# Altium PCB Gastroscopy-Tool-Interface.PcbDoc
Units mm, origin at the board's own origin, x right, y up, seen from the top; angles counter-clockwise.
Board outline 14.8 x 37 mm, 4 copper layers (Top Layer, Layer 4 (GND), Layer 5 (PWR), Bottom Layer), stack 1.49 mm thick; 29 components, 21 nets, 110 pads, 0 vias.
Unrouted connection lines stored in the file: 58.
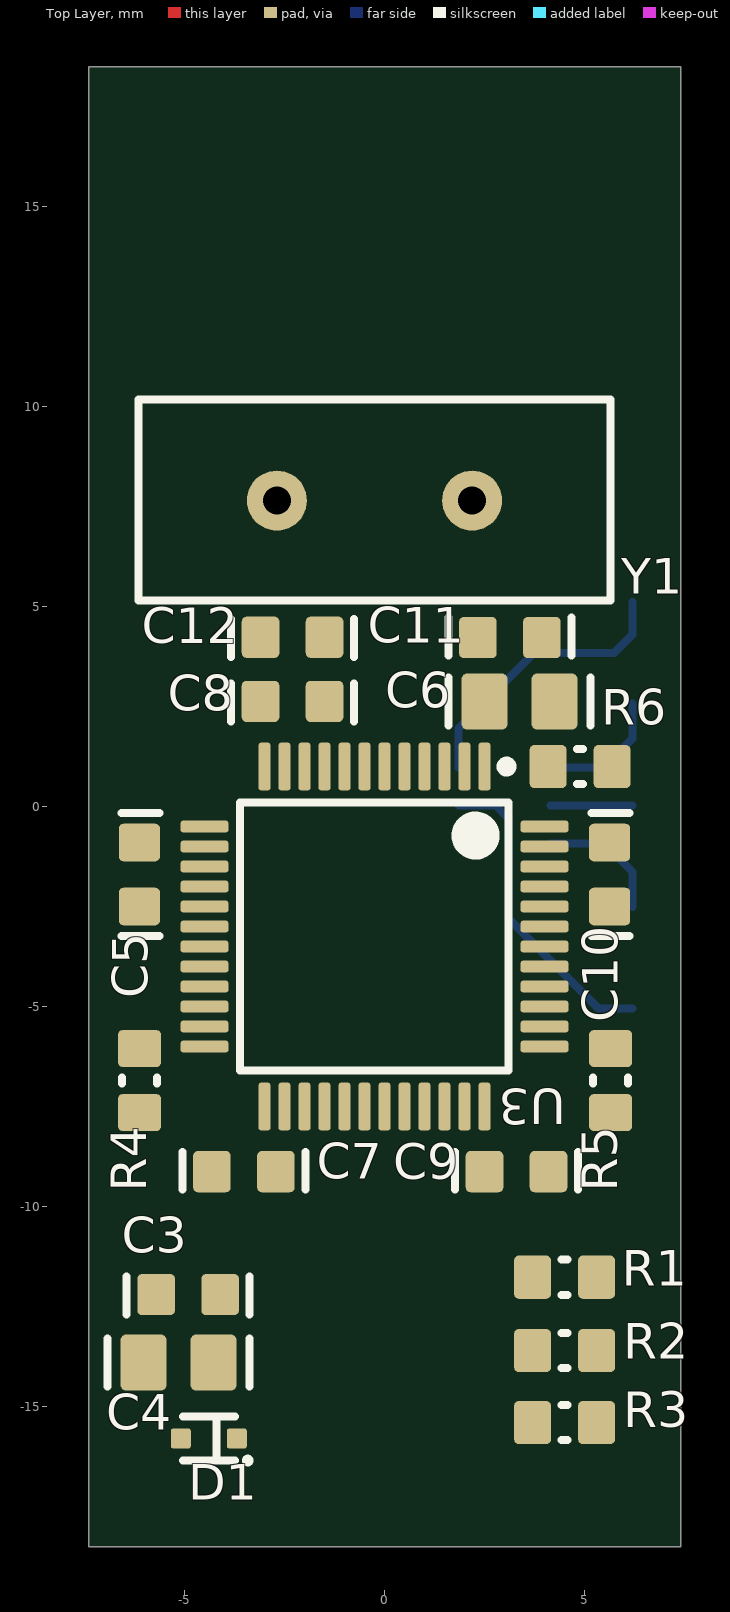
[diagram p0: Top Layer view]
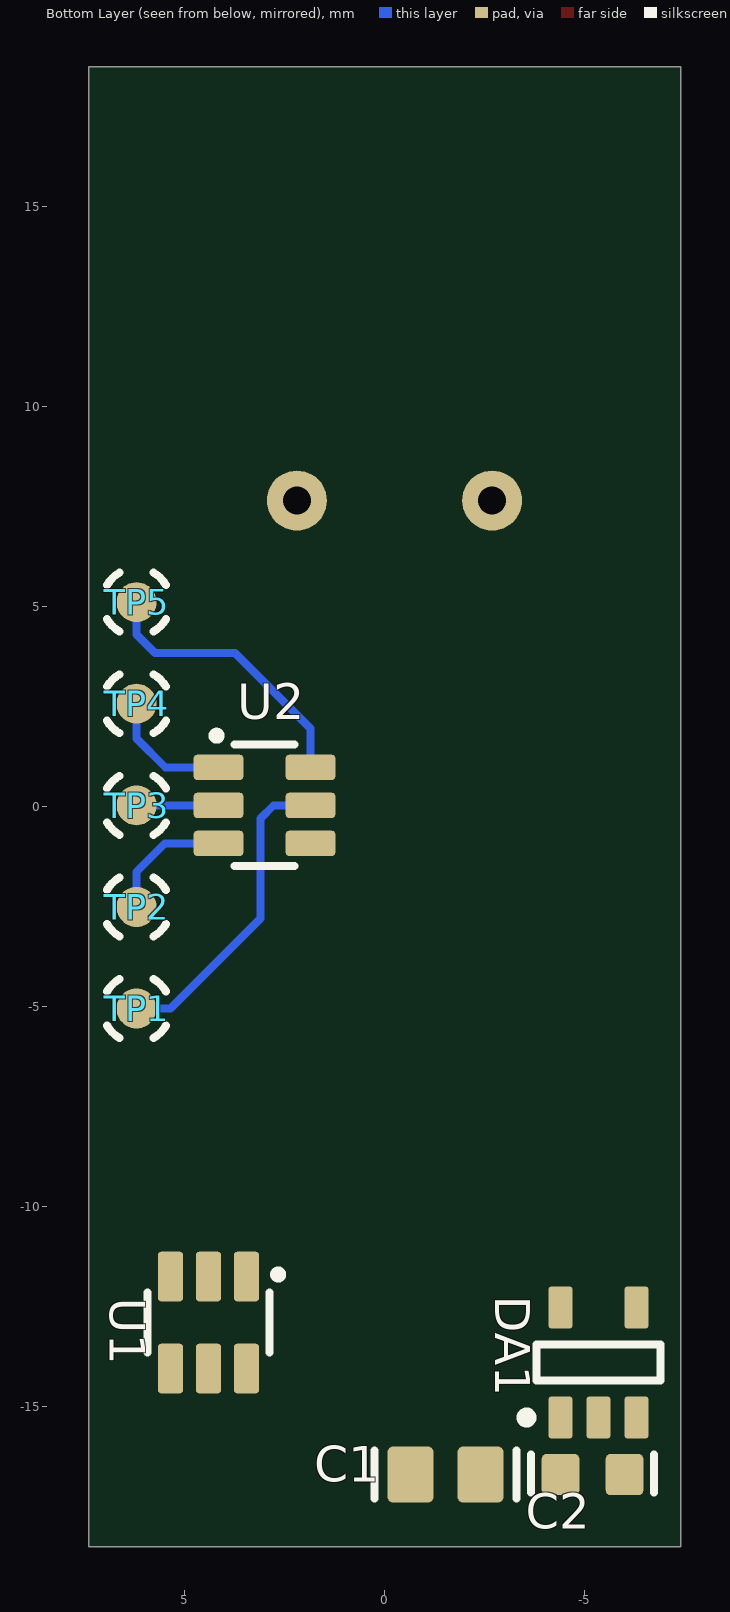
[diagram p1: Bottom Layer view, seen from below]

## Layer stack, top to bottom
Top Solder: solder mask 0.0127, Dk 4
Top Layer: signal copper 0.018
Prepreg 1: prepreg 0.127, Dk 4.2
Layer 4 (GND): signal copper 0.018
Core 2: core 1.164, Dk 4.2
Layer 5 (PWR): signal copper 0.018
Prepreg 4: prepreg 0.127, Dk 4.2
Bottom Layer: signal copper 0.018
Bottom Solder: solder mask 0.0127, Dk 4

## Board outline
-7.4,-18.5 7.4,-18.5 7.4,18.5 -7.4,18.5

## Design rules (kind name [scope] priority, off if disabled: settings)
BoardOutlineClearance [All] p1: gap=0.508 ignorepadtopadclearanceinfootprint=FALSE
Clearance Clearance_CHASSIS [InNet('CHASSIS')] p1: gap=0.508 ignorepadtopadclearanceinfootprint=FALSE // ETH chassis to other
Clearance Clearance_TP [HasFootprint('TEST_POINT_TH')] p2: gap=0.508 ignorepadtopadclearanceinfootprint=FALSE // Test point for programming
Clearance Clearance_ETH_VDDA [InNamedPolygon('ETH_VDDA') vs InNamedPolygon('SOLID_3V3_LAYER5')] p3: gap=0.127 ignorepadtopadclearanceinfootprint=FALSE except(0.508: Fill-Fill Fill-Poly Fill-Region Poly-Poly Poly-Region Region-Region) // ETH_VDDA clearance to 3V3 polygon
Clearance Clearance_VCC_PLANE [InNamedPolygon('SOLID_3V3_LAYER5')] p4: gap=0.178 ignorepadtopadclearanceinfootprint=FALSE // Clearance between 3V3 VCC plane and vias
Clearance Clearance_Signal_Via [IsLinkedToPadViaTemplate('signal_via')] p5: gap=0.127 ignorepadtopadclearanceinfootprint=FALSE except(0.178: Via-Fill Via-Poly Via-Region) // 50 Ohm via, clearance to GND plane and to other polygons
Clearance Clearance_3W [OnLayer('Layer 3 (SIG)')] p6: gap=0.127 ignorepadtopadclearanceinfootprint=FALSE except(0.254: Arc-Arc Arc-Track Arc-SMDPad Arc-THPad Arc-Via Arc-Fill Arc-Poly Arc-Region Arc-Text Arc-Hole Track-Track Track-SMDPad Track-THPad Track-Via Track-Fill Track-Poly Track-Region Track-Text Track-Hole) // 3W rule for high-speed nets; applicable for 5mil tracks
Clearance [All] p7: gap=0.127 ignorepadtopadclearanceinfootprint=FALSE except(0.26: Arc-Hole Track-Hole SMDPad-Hole THPad-Hole Via-Hole Fill-Hole Poly-Hole Region-Hole Text-Hole) // Track-Track 7 mil for MCU
ComponentClearance ComponentClearance_TERMINALS [HasFootprint('DG128-5.0-03P-14') or HasFootprint('DG128-5.0-02P-14')] p1: gap=0 collisioncheckmode=3 verticalgap=0 showdistances=FALSE
ComponentClearance [All] p2: gap=0.508 collisioncheckmode=3 verticalgap=1.016 showdistances=FALSE donotcheckwithout3dbody=TRUE
DiffPairsRouting DiffPairsRouting_RS485 [InDifferentialPairClass('RS485_DIFFPAIR')] p1: maxlimit=0.305 minlimit=0.305 mostfreqgap=0.305 toplayer_minwidth=0.178 toplayer_maxwidth=0.178 toplayer_prefwidth=0.178 midlayer3_minwidth=0.178 midlayer3_maxwidth=0.178 midlayer3_prefwidth=0.178 midlayer4_minwidth=0.178 midlayer4_maxwidth=0.178 midlayer4_prefwidth=0.178 bottomlayer_minwidth=0.178 bottomlayer_maxwidth=0.178 bottomlayer_prefwidth=0.178 maxuncoupledlength=12.7 // 120 Ohm differential impedance
DiffPairsRouting DiffPairsRouting_USB [InDifferentialPairClass('USB_DIFFPAIR')] p2: maxlimit=0.127 minlimit=0.1 mostfreqgap=0.127 toplayer_mingap=0.127 toplayer_minwidth=0.19 toplayer_maxwidth=0.19 toplayer_prefwidth=0.19 bottomlayer_mingap=0.127 bottomlayer_minwidth=0.19 bottomlayer_maxwidth=0.19 bottomlayer_prefwidth=0.19 impedanceprofiledriven=TRUE impedanceprofileid={13F299FD-EDF9-4D52-ACC5-885CEE12CEAA} impedanceprofilevalue=90.000000 maxuncoupledlength=1.016 // 90 Ohm differential impedance
DiffPairsRouting DiffPairsRouting_MDI [InDifferentialPairClass('MDI_DIFFPAIR')] p3: maxlimit=0.127 minlimit=0.127 mostfreqgap=0.127 toplayer_minwidth=0.203 toplayer_maxwidth=0.203 toplayer_prefwidth=0.203 midlayer3_minwidth=0.203 midlayer3_maxwidth=0.203 midlayer3_prefwidth=0.203 midlayer4_minwidth=0.203 midlayer4_maxwidth=0.203 midlayer4_prefwidth=0.203 bottomlayer_minwidth=0.203 bottomlayer_maxwidth=0.203 bottomlayer_prefwidth=0.203 maxuncoupledlength=1.016 // 100 Ohm differential impedance
HoleSize [All] p1: absolutevalues=TRUE maxlimit=6.35 minlimit=0.254 maxpercent=80.000 minpercent=20.000
HoleToHoleClearance [All] p1: gap=0.381 allowstackedmicrovias=TRUE
MatchedLengths MatchLengths_xSignals_LCD [InxSignalClass('xSignals_LCD')] p1: tolerance=1.016 checknetsindiffpair=FALSE checkdiffpairvsdiffpair=TRUE checkxsignals=TRUE checkothers=TRUE usedelayunits=TRUE delaytolerance=100.000000 targetsourcename=LCD_CLK-LCD_CLK_MCU_PP1
MatchedLengths MatchLengths_xSignals_ETH [InxSignalClass('xSignals_ETH')] p2: tolerance=1.016 checknetsindiffpair=FALSE checkdiffpairvsdiffpair=TRUE checkxsignals=TRUE checkothers=TRUE usedelayunits=TRUE delaytolerance=100.000000 targetsourcename=ETH_CLK-ETH_RMII_CLK_PP1
MatchedLengths MatchLengths_xSignals_FMC [InxSignalClass('xSignals_FMC')] p3: tolerance=1.016 checknetsindiffpair=FALSE checkdiffpairvsdiffpair=TRUE checkxsignals=TRUE checkothers=TRUE usedelayunits=TRUE delaytolerance=100.000000 targetsourcename=FMC_CLK-FMC_CLK_MCU_PP1
MatchedLengths MatchLengths_xSignals_SDC [InxSignalClass('xSignals_SDC')] p4: tolerance=1.016 checknetsindiffpair=FALSE checkdiffpairvsdiffpair=TRUE checkxsignals=TRUE checkothers=TRUE usedelayunits=TRUE delaytolerance=100.000000 targetsourcename=SDMMC1_SDCARD_CK-SDMMC1_SDCARD_CK_MCU_PP1
MatchedLengths MatchedLengths_Diff_Grouped_MDI [InDifferentialPairClass('MDI_DIFFPAIR')] p5: tolerance=1.016 checknetsindiffpair=FALSE checkdiffpairvsdiffpair=TRUE checkxsignals=TRUE checkothers=TRUE
MatchedLengths MatchedLengths_Diff_Within_MDI [InDifferentialPairClass('MDI_DIFFPAIR')] p6: tolerance=1.016 checknetsindiffpair=TRUE checkdiffpairvsdiffpair=FALSE checkxsignals=FALSE checkothers=FALSE
MatchedLengths MatchedLengths_Diff_Within_RS485 [InDifferentialPairClass('RS485_DIFFPAIR')] p7: tolerance=2.54 checknetsindiffpair=TRUE checkdiffpairvsdiffpair=FALSE checkxsignals=FALSE checkothers=FALSE
MatchedLengths MatchedLengths_Diff_Within_USB [InDifferentialPairClass('USB_DIFFPAIR')] p8: tolerance=1.016 checknetsindiffpair=TRUE checkdiffpairvsdiffpair=FALSE checkxsignals=FALSE checkothers=FALSE
MinimumAnnularRing [All] p1: minimumring=0.127
MinimumSolderMaskSliver [All] p1: minsoldermaskwidth=0.05
PlaneConnect [All] p1: planeconnectstyle=Direct reliefexpansion=0.508 reliefentries=4 reliefconductorwidth=0.254 reliefairgap=0.254
PolygonConnect PolygonConnect_POWER_IN_VIN [InNet('VIN+') Or InNet('VIN-') vs HasFootprint('1250360000') Or HasFootprint('1250370000')] p1: connectstyle=Relief reliefconductorwidth=1.27 reliefentries=4 polygonreliefangle="90 Angle" airgapwidth=0.127 // POWER IN terminal blocks to VIN
PolygonConnect PolygonConnect_POWER_TVS_VIN [InNet('VIN+') Or InNet('VIN-') vs HasFootprint('SMA-BIDIR')] p2: connectstyle=Relief reliefconductorwidth=1.27 reliefentries=4 polygonreliefangle="90 Angle" airgapwidth=0.127 // POWER IN TVS diode to VIN
PolygonConnect PolygonConnect_POWER_FUSE [HasFootprint('0ZRS0200FF1E')] p3: connectstyle=Relief reliefconductorwidth=1.27 reliefentries=4 polygonreliefangle="90 Angle" airgapwidth=0.127 // POWER IN fuse
PolygonConnect PolygonConnect_POWER_SWITCH [HasFootprint('48BFSP1M2QT')] p4: connectstyle=Relief reliefconductorwidth=1.016 reliefentries=4 polygonreliefangle="90 Angle" airgapwidth=0.127 // POWER switch
PolygonConnect PolygonConnect_POWER_FILTER [HasFootprint('BNX022-01L')] p5: connectstyle=Relief reliefconductorwidth=2.032 reliefentries=4 polygonreliefangle="90 Angle" airgapwidth=0.127 // POWER filter FL1
PolygonConnect PolygonConnect_POWER_IN_MOSFET [InComponent('Q1')] p6: connectstyle=Relief reliefconductorwidth=0.381 reliefentries=4 polygonreliefangle="90 Angle" airgapwidth=0.127 // Q1 reverse polarity protection MOSFET
PolygonConnect PolygonConnect_MOSFET_ZENER [InComponent('D2')] p7: connectstyle=Relief reliefconductorwidth=0.508 reliefentries=4 polygonreliefangle="90 Angle" airgapwidth=0.127 // Q1 MOSFET gate voltage stabilizer
PolygonConnect PolygonConnect_DCDC_IC [HasFootprint('SOIC-8EP_150MIL') vs InNet('GND')] p8: connectstyle=Relief reliefconductorwidth=2.032 reliefentries=4 polygonreliefangle="90 Angle" airgapwidth=0.127 // DC/DC IC connection
PolygonConnect PolygonConnect_DCDC_CAPS [(WithinRoom('DC/DC Step-Down Converter 12V') Or WithinRoom('DC/DC Step-Down Converter 3.3V')) And HasFootprint('CAP_1210')] p9: connectstyle=Relief reliefconductorwidth=1.27 reliefentries=4 polygonreliefangle="90 Angle" airgapwidth=0.127 // DC/DC input and output capacitors
PolygonConnect PolygonConnect_ETH_BULKCAP [WithinRoom('10/100 Mbps Ethernet PHY') And HasFootprint('CAP_1210')] p10: connectstyle=Relief reliefconductorwidth=1.27 reliefentries=4 polygonreliefangle="90 Angle" airgapwidth=0.127 // 1210 bulck capacitor in ETH power supply
PolygonConnect PolygonConnect_DCDC_IND [(InNet('12V') Or InNet('3V3')) And HasFootprint('SRU1048')] p11: connectstyle=Relief reliefconductorwidth=1.778 reliefentries=4 polygonreliefangle="90 Angle" airgapwidth=0.127 // DC/DC inductors terminal in specific nets
PolygonConnect PolygonConnect_DCDC_5V_IC [HasFootprint('SOT-23-6') vs (InNet('GND') Or InNet('12V')) And WithinRoom('USB 2.0 Full-Speed')] p12: connectstyle=Relief reliefconductorwidth=0.584 reliefentries=4 polygonreliefangle="90 Angle" airgapwidth=0.127 // DC/DC 5V IC connection
PolygonConnect PolygonConnect_DCDC_5V_CAPS [HasFootprint('CAP_1210') vs InNet('5V')] p13: connectstyle=Direct reliefconductorwidth=1.27 reliefentries=4 polygonreliefangle="90 Angle" airgapwidth=0.3 // Caps connection to GND and VCC polygons
PolygonConnect PolygonConnect_DCDC_5V_OUT_CAP [InNet('5V') And HasFootprint('CAP_0603')] p14: connectstyle=Relief reliefconductorwidth=0.813 reliefentries=4 polygonreliefangle="90 Angle" airgapwidth=0.127 // Output cap connection to VCC polygon
PolygonConnect PolygonConnect_DCDC_5V_IND [HasFootprint('SDR1006')] p15: connectstyle=Direct reliefconductorwidth=0.8 reliefentries=4 polygonreliefangle="90 Angle" airgapwidth=0.3 // DC/DC 5V inductor terminal in specific nets
PolygonConnect PolygonConnect_DCDC_HOTSWITCH [InNet('NetC4_2')] p16: connectstyle=Relief reliefconductorwidth=0.8 reliefentries=4 polygonreliefangle="90 Angle" airgapwidth=0.3 // DC/DC 5V inductor terminal in specific nets
PolygonConnect PolygonConnect_DCDC_BL_IC [WithinRoom('LCD & Capacitive Touchscreen Module') And HasFootprint('SOT-23-6')] p17: connectstyle=Relief reliefconductorwidth=0.584 reliefentries=4 polygonreliefangle="90 Angle" airgapwidth=0.127 // DC/DC Backlight IC
PolygonConnect PolygonConnect_DCDC_BL_CAPS [WithinRoom('LCD & Capacitive Touchscreen Module') And HasFootprint('CAP_0805')] p18: connectstyle=Relief reliefconductorwidth=1.016 reliefentries=4 polygonreliefangle="90 Angle" airgapwidth=0.127 // DC/DC Backlight capacitors
PolygonConnect PolygonConnect_DCDC_BL_IND [WithinRoom('LCD & Capacitive Touchscreen Module') And HasFootprint('LQH3NPN470MMEL')] p19: connectstyle=Relief reliefconductorwidth=0.965 reliefentries=4 polygonreliefangle="90 Angle" airgapwidth=0.127 // DC/DC Backlight inductor
PolygonConnect PolygonConnect_WIFI_GND [InNet('GND') And HasFootprint('ATWINC3400-MR210CA142')] p20: connectstyle=Relief reliefconductorwidth=0.762 reliefentries=4 polygonreliefangle="90 Angle" airgapwidth=0.127 // WiFi module to GND poly
PolygonConnect PolygonConnect_USB_CONN_GND [InNet('GND') vs HasFootprint('USB3106-30-0230-A')] p21: connectstyle=Relief reliefconductorwidth=0.508 reliefentries=4 polygonreliefangle="90 Angle" airgapwidth=0.203 // USB connector GND
PolygonConnect PolygonConnect_FB [HasFootprint('FB_1206')] p22: connectstyle=Relief reliefconductorwidth=1.143 reliefentries=4 polygonreliefangle="90 Angle" airgapwidth=0.127 // Ferrite Bead to poly
PolygonConnect PolygonConnect_FUSE [HasFootprint('PTC_1812')] p23: connectstyle=Relief reliefconductorwidth=1.778 reliefentries=4 polygonreliefangle="90 Angle" airgapwidth=0.127 // Fuse to poly
PolygonConnect PolygonConnect_12V_OUT_SMA [(WithinRoom('RS-485 Interface') Or WithinRoom('Wiegand Interface')) And HasFootprint('SMA')] p24: connectstyle=Relief reliefconductorwidth=1.524 reliefentries=4 polygonreliefangle="90 Angle" airgapwidth=0.127 // TVS diodes in SMA package, 12V output polygons
PolygonConnect PolygonConnect_TP_GND [InNet('GND') vs HasFootprint('TEST_POINT_TH') Or HasFootprint('TEST_POINT_SMT')] p25: connectstyle=Relief reliefconductorwidth=0.508 reliefentries=4 polygonreliefangle="90 Angle" airgapwidth=0.508 // Test points to GND
PolygonConnect PolygonConnect_ETH_CHASSIS [InNet('CHASSIS')] p26: connectstyle=Relief reliefconductorwidth=1.016 reliefentries=4 polygonreliefangle="90 Angle" airgapwidth=0.381 // ETH Chassis
PolygonConnect PolygonConnect_VIA [IsVia] p27: connectstyle=Direct reliefconductorwidth=0.8 reliefentries=4 polygonreliefangle="90 Angle" airgapwidth=0.3
PolygonConnect [All] p28: connectstyle=Relief reliefconductorwidth=0.8 reliefentries=4 polygonreliefangle="90 Angle" airgapwidth=0.3
ReturnPath [OnLayer('Layer 3 (SIG)')] p1: _gaplimit=0.127
RoutingVias [All] p1: holewidth=0.254 width=0.66 viastyle="Through Hole" minholewidth=0.254 minwidth=0.66 maxholewidth=1.016 maxwidth=1.422 useviatemplates=TRUE viatemplateguid#1={79E6DCE3-D317-4519-9061-2CDD01818D80} viatemplateguid#2={DB4F5FA1-A2BD-4F5F-94AF-CFE80AD55038} viatemplatename#1=power_via viatemplatename#2=signal_via
SilkToSilkClearance [All] p1: silktosilkclearance=0.051
SilkToSolderMaskClearance [All] p1: minsilkscreentomaskgap=0.051 clearancetoexposedcopper=FALSE
SolderMaskExpansion SolderMaskExpansion_LQFP176 [HasFootprint('LQFP176')] p1: expansion=0.102 istentingtop=FALSE
SolderMaskExpansion SolderMaskExpansion_TSSOP-14 [HasFootprint('TSSOP-14')] p2: expansion=0.102 istentingtop=FALSE
SolderMaskExpansion SolderMaskExpansion_TSOP-54 [HasFootprint('TSOP-54-II')] p3: expansion=0.127 istentingtop=FALSE
SolderMaskExpansion SolderMaskExpansion_SDCard [HasFootprint('475710001')] p4: expansion=0.102 istentingtop=FALSE
SolderMaskExpansion SolderMaskExpansion_LCD_conns [HasFootprint('62684-402100AHLF') Or HasFootprint('0527460671')] p5: expansion=0.102 istentingtop=FALSE
SolderMaskExpansion SolderMaskExpansion_Via [IsVia] p6: expansion=0.152 istentingtop=TRUE
SolderMaskExpansion [All] p7: expansion=0.076 istentingtop=FALSE
UnRoutedNet [All] p1: checkbadconnections=TRUE
Width Width_Signal_Buried [OnLayer('Layer 3 (SIG)') And  Not InNet('5V')] p1: maxlimit=0.127 minlimit=0.127 preferedwidth=0.127 // 50 Ohm track on buried layers
Width [All] p2: maxlimit=2.54 minlimit=0.127 preferedwidth=0.3 // 50 Ohm track on top and bottom layers
21 further rules are at their usual default settings.

## Classes and differential pairs
component class Connectors: R1 R2 R3 U1
component class "3V3 Domain": C1 C2 C3 C4 D1 DA1
differential pair class USB_DIFFPAIR: D MCU_USB_D USB
component class MCU: C5 C6 C7 C8 C9 C10 C11 C12 R4 R5 R6 TP1 TP2 TP3 TP4 TP5 U2 U3 Y1
differential pair USB: +USB_P -USB_N
differential pair MCU_USB_D: +MCU_USB_D_P -MCU_USB_D_N
differential pair D: +D_P -D_N

## Components (designator, comment, footprint, x,y, rotation, side; value= is the part's Value field where it differs from the comment)
C1 "10uF" CAP_0805 -1.525,-16.7 r180 bottom
C2 "100nF" CAP_0603 -5.2,-16.7 r180 bottom
C3 "100nF" CAP_0603 -4.91,-12.2 r180 top
C4 "10uF" CAP_0805 -5.15,-13.9 r0 top
C5 "100nF" CAP_0603 -6.128,-1.7 r270 top
C6 "10uF" CAP_0805 3.375,2.625 r180 top
C7 "100nF" CAP_0603 -3.515,-9.128 r0 top
C8 "100nF" CAP_0603 -2.3,2.628 r180 top
C9 "100nF" CAP_0603 3.3,-9.128 r0 top
C10 "100nF" CAP_0603 5.628,-1.7 r270 top
C11 "18pF" CAP_0603 3.135,4.225 r0 top
C12 "18pF" CAP_0603 -2.3,4.231 r180 top
D1 "BAS516,315" SOD-523 -4.39,-15.8 r180 top
DA1 "TLV75533PDBVR" SOT-23-5 -5.35,-13.9 r90 bottom
R1 "24R" RES_0603 4.5,-11.766 r0 top
R2 "24R" RES_0603 4.5,-13.6 r0 top
R3 "1.5kR" RES_0603 4.5,-15.4 r0 top
R4 "10kR" RES_0603 -6.125,-6.85 r270 top
R5 "10kR" RES_0603 5.653,-6.85 r90 top
R6 "10kR" RES_0603 4.889,1 r180 top
TP1 "TEST_POINT_SMT" TEST_POINT_SMT 6.2,-5.05 r180 bottom
TP2 "TEST_POINT_SMT" TEST_POINT_SMT 6.2,-2.51 r90 bottom
TP3 "TEST_POINT_SMT" TEST_POINT_SMT 6.2,0.03 r90 bottom
TP4 "TEST_POINT_SMT" TEST_POINT_SMT 6.2,2.57 r90 bottom
TP5 "TEST_POINT_SMT" TEST_POINT_SMT 6.2,5.11 r90 bottom
U1 "USBLC6-2SC6" SOT-23-6 4.4,-12.9 r270 bottom
U2 "SRV05-4ATR" SOT-23-6 3,0.03 r180 bottom
U3 "STM32F103C6T6A" LQFP48 -0.25,-3.25 r270 top
Y1 "8MHz" HC-49/US -0.25,7.65 r0 top

## Footprints (in the part's own frame and the unit in brackets; to place one, negate y for a bottom-side part, rotate by r counter-clockwise, add the part's x,y. Pads: shape width x height; smd on the part's side, far side on the other; paste and mask are expansions set on the pad)
CAP_0603 [mm] "Generic 0603 capacitor, IPC"
  rrect25% 0.94x1.03 smd: 1(-0.8,0) 2(0.8,0)
  silkscreen extent -1.53,-0.45 1.53,0.5, body extent -0.8,-0.4 0.8,0.4, height 0.9
CAP_0805 [mm] "Generic 0805 capacitor, IPC"
  rrect25% 1.15x1.4 smd: 1(-0.875,0) 2(0.875,0)
  silkscreen extent -1.77,-0.6 1.77,0.6, body extent -1.1,-0.67 1.1,0.67, height 1.46
HC-49/US [mm]
  round 1.5 hole 0.7: 1(-2.44,0) 2(2.44,0)
  silkscreen extent -5.9,-2.5 5.9,2.52, body extent -5.67,-2.32 5.68,2.33, height 3.6
LQFP48 [mm] "Thin QFP, 48-Leads, Body 7x7mm, Pitch 0.5mm, IPC Medium Density"
  rrect50% 1.2x0.3 smd mask+0.05: 1(-4.25,2.75) 2(-4.25,2.25) 3(-4.25,1.75) 4(-4.25,1.25) 5(-4.25,0.75) 6(-4.25,0.25) 7(-4.25,-0.25) 8(-4.25,-0.75) 9(-4.25,-1.25) 10(-4.25,-1.75) 11(-4.25,-2.25) 12(-4.25,-2.75) 25(4.25,-2.75) 26(4.25,-2.25) 27(4.25,-1.75) 28(4.25,-1.25) 29(4.25,-0.75) 30(4.25,-0.25) 31(4.25,0.25) 32(4.25,0.75) 33(4.25,1.25) 34(4.25,1.75) 35(4.25,2.25) 36(4.25,2.75)
  rrect50% 0.3x1.2 smd mask+0.05: 13(-2.75,-4.25) 14(-2.25,-4.25) 15(-1.75,-4.25) 16(-1.25,-4.25) 17(-0.75,-4.25) 18(-0.25,-4.25) 19(0.25,-4.25) 20(0.75,-4.25) 21(1.25,-4.25) 22(1.75,-4.25) 23(2.25,-4.25) 24(2.75,-4.25) 37(2.75,4.25) 38(2.25,4.25) 39(1.75,4.25) 40(1.25,4.25) 41(0.75,4.25) 42(0.25,4.25) 43(-0.25,4.25) 44(-0.75,4.25) 45(-1.25,4.25) 46(-1.75,4.25) 47(-2.25,4.25) 48(-2.75,4.25)
  silkscreen extent -4.37,-3.36 3.35,3.43, body extent -4.51,-4.51 4.51,4.51, height 1.46
RES_0603 [mm] "Generic 0603 resistor, IPC"
  rrect25% 0.92x1.08 smd: 1(-0.8,0) 2(0.8,0)
  silkscreen extent -0.08,-0.44 0.08,0.44, body extent -0.8,-0.4 0.8,0.4, height 0.5
SOD-523 [mm]
  rrect25% 0.5x0.5 smd: 1(-0.7,0) 2(0.7,0)
  silkscreen extent -1.04,-0.55 0.65,0.62, body extent -0.8,-0.4 0.8,0.4, height 0.7
SOT-23-5 [mm] "SOT23, 5-Leads, IPC"
  rrect25% 1.05x0.6 smd: 1(-1.375,0.95) 2(-1.375,0) 3(-1.375,-0.95) 4(1.375,-0.95) 5(1.375,0.95)
  silkscreen extent -1.5,-1.55 0.45,1.93, body extent -1.4,-1.45 1.4,1.45, height 1.45
SOT-23-6 [mm]
  rrect25% 1.24x0.63 smd: 1(-1.15,0.95) 2(-1.15,0) 3(-1.15,-0.95) 4(1.15,-0.95) 5(1.15,0) 6(1.15,0.95)
  silkscreen extent -1.3,-1.52 0.75,1.84, body extent -1.2,-1.4 1.23,1.4, height 1.09
TEST_POINT_SMT [mm] "SMT test point, 40 mil pad"
  round 1 smd paste-2539.97: 1(0,0)
  silkscreen extent -0.74,-0.74 0.74,0.74

## Part data
C1 C4 C6: library part CL21B106KOQNNNE, "CAP CER 10UF 16V X7R 0805", Case Code (Imperial)=0805, Case Code (Metric)=2012, Dielectric=X7R, Manufacturer=Samsung, Max Operating Temperature=125°C, Min Operating Temperature=-55°C, Package Quantity=1, Tolerance=10%, Voltage=16V, Capacitance=10uF, Case/Package=0805, Category="Ceramic Capacitors", ComponentLink1Description=https://datasheet.ciiva.com/25794/cl21b106koqnnne-25794472.pdf?src-supplier=Digi-Key, ComponentLink1URL=https://datasheet.ciiva.com/25794/cl21b106koqnnne-25794472.pdf?src-supplier=Digi-Key, ComponentLink2Description=https://datasheet.ciiva.com/16428/cl21b106koqnnne-16428887.pdf?src-supplier=Future+Electronics, ComponentLink2URL=https://datasheet.ciiva.com/16428/cl21b106koqnnne-16428887.pdf?src-supplier=Future+Electronics, ComponentLink3Description=https://datasheet.ciiva.com/26920/getdatasheetpartid-355170-26920201.pdf?src-supplier=Verical, ComponentLink3URL=https://datasheet.ciiva.com/26920/getdatasheetpartid-355170-26920201.pdf?src-supplier=Verical, Construction=Flat, Contact Plating=Tin, Depth=1.25mm, Height=1.25mm, Length=2mm, Manufacturer Part Number=CL21B106KOQNNNE, Mount="Surface Mount", Packaging="Tape and Reel", Pricing 1="2000=0,02892, 4000=0,02851, 8000=0,02768, 12000=0,02707, 16000=0,02603 (USD)", Radiation Hardening=No, RoHS=Yes, RoHS Compliant=Yes, Series=CL, Stock 1=1089000, Supplier 1=Avnet, Supplier Part Number 1=CL21B106KOQNNNE, Thickness=0.055inch, Voltage Rating=16V, Width=0.049inch
C2 C3 C5 C7 C8 C9 C10: library part CL10B104KB8NNNL, "CAP CER 0.1UF 50V X7R 0603", Case/Package=0603, Dielectric=X7R, Manufacturer 1=Samsung, Max Operating Temperature=125°C, Min Operating Temperature=-55°C, Package Quantity=15000, Supplier Part Number 1=1276-CL10B104KB8NNNLTR-ND, Tolerance=10%, Voltage Rating=50V, Capacitance=100nF, Category="Ceramic Capacitors", ComponentLink1Description=https://datasheet.ciiva.com/26838/getdatasheetpartid-357523-26838415.pdf?src-supplier=Verical, ComponentLink1URL=https://datasheet.ciiva.com/26838/getdatasheetpartid-357523-26838415.pdf?src-supplier=Verical, ComponentLink2Description=https://datasheet.ciiva.com/25741/cl10b104kb8nnnl-25741341.pdf?src-supplier=Digi-Key, ComponentLink2URL=https://datasheet.ciiva.com/25741/cl10b104kb8nnnl-25741341.pdf?src-supplier=Digi-Key, Construction=Flat, Depth=0.8mm, Height=0.8mm, Length=1.6mm, Manufacturer Part Number 1=CL10B104KB8NNNL, Mount="Surface Mount", Packaging="Tape and Reel", Pricing 1="15000=0,00532, 30000=0,00506 (USD)", Radiation Hardening=No, RoHS=Yes, RoHS Compliant=Yes, Series=CL, Stock 1=2348404, Supplier 1=Digi-Key, Thickness=0.035inch, Voltage Rating (DC)=50V, Width=0.031inch
C11 C12: library part C0603C180J5GACAUTO, "CAP CER 18PF 50V C0G/NP0 0603", Case/Package=0603, Dielectric=C0G, Dielectric Material=Ceramic, Manufacturer=KEMET, Max Operating Temperature=125°C, Min Operating Temperature=-55°C, Tolerance=5%, Voltage Rating (DC)=50V, Capacitance=18pF, Category="Ceramic Capacitors", ComponentLink1Description=http://www.farnell.com/datasheets/2747367.pdf?src-supplier=Farnell, ComponentLink1URL=http://www.farnell.com/datasheets/2747367.pdf?src-supplier=Farnell, ComponentLink2Description=https://api.kemet.com/component-edge/download/datasheet/C0603C180J5GACAUTO.pdf?src-supplier=Digi-Key, ComponentLink2URL=https://api.kemet.com/component-edge/download/datasheet/C0603C180J5GACAUTO.pdf?src-supplier=Digi-Key, ComponentLink3Description=http://www.farnell.com/datasheets/2747367.pdf?src-supplier=Newark, ComponentLink3URL=http://www.farnell.com/datasheets/2747367.pdf?src-supplier=Newark, ComponentLink4Description=http://www.farnell.com/datasheets/2747367.pdf?src-supplier=Element14, ComponentLink4URL=http://www.farnell.com/datasheets/2747367.pdf?src-supplier=Element14, Depth=0.8mm, Lead Free="Lead Free", Length=1.6mm, Manufacturer 1=KEMET, Manufacturer Part Number=C0603C180J5GACAUTO, Manufacturer Part Number 1=C0603C180J5GACAUTO, Packaging="Tape and Reel", Pricing 1="1=0.10780, 10=0.04490, 25=0.04440, 100=0.03270, 250=0.03140, 500=0.02510, 1000=0.01950, 3000=0.01910, 6000=0.01510 (USD)", RoHS=Yes, RoHS Compliant=Yes, Stock 1=13801, Supplier 1="Arrow Electronics", Supplier Part Number 1=C0603C180J5GACAUTO
D1: "DIODE GEN PURP 100V 250MA SOD523", Manufacturer 1=Nexperia, Category="Rectifier Diodes", Manufacturer Part Number 1=BAS516,315, Pricing 1="48000=0,02889, 64000=0,02803, 112000=0,02716, 240000=0,02630, 480000=0,02543, 2400000=0,02457, 4800000=0,02370 (USD)", RoHS=Yes, RoHS Compliant=Yes, Supplier 1=Avnet, Supplier Part Number 1=BAS516,315
DA1: "IC REG LINEAR 3.3V 500MA SOT23-5", Case/Package=SOT-23-5, Dropout Voltage=238mV, Manufacturer 1="Texas Instruments", Max Input Voltage=5.5V, Max Operating Temperature=125°C, Max Output Voltage=3.3V, Min Operating Temperature=-40°C, Output Current=500mA, Power Supply Rejection Ratio (PSRR)=52dB, Quiescent Current=31uA, Supplier Part Number 1=595-TLV75533PDBVR, Category="Voltage Regulators - Linear", ComponentLink1Description=http://www.ti.com/lit/ds/symlink/tlv755p.pdf?src-supplier=Digi-Key, ComponentLink1URL=http://www.ti.com/lit/ds/symlink/tlv755p.pdf?src-supplier=Digi-Key, ComponentLink2Description=http://www.ti.com/general/docs/suppproductinfo.tsp?distId=10&amp;gotoUrl=http%3A%2F%2Fwww.ti.com%2Flit%2Fgpn%2Ftlv755p&src-supplier=Digi-Key, ComponentLink2URL=http://www.ti.com/general/docs/suppproductinfo.tsp?distId=10&amp;gotoUrl=http%3A%2F%2Fwww.ti.com%2Flit%2Fgpn%2Ftlv755p&src-supplier=Digi-Key, Manufacturer Part Number 1=TLV75533PDBVR, Min Output Voltage=3.3V, Mount="Surface Mount", Number of Regulators=1, Output Configuration=Positive, Output Type=Fixed, Packaging="Cut Tape", Pricing 1="1=0,46000, 10=0,39400, 50=0,39400, 100=0,27300, 1000=0,17900, 10000=0,16200 (USD)", RoHS=Yes, RoHS Compliant=Yes, Stock 1=90, Supplier 1=Mouser
R1 R2: library part RC0603FR-0724RL, "RES 24 OHM 1% 1/10W 0603", Case Code (Imperial)=0603, Case Code (Metric)=1608, Manufacturer 1=Yageo, Max Operating Temperature=155°C, Max Power Dissipation=100mW, Min Operating Temperature=-55°C, Temperature Coefficient=100ppm/°C, Tolerance=1%, Voltage Rating=50V, Working Voltage=75V, Case/Package=0603, Category="Chip SMD Resistors", Features="Moisture Resistant", Lead Free="Lead Free", Manufacturer Part Number 1=RC0603FR-0724RL, Number of Terminations=2, Packaging="Tape and Reel", Power Rating=100mW, Pricing 1="5000=0,00190, 125000=0,00160 (USD)", Resistance=24R, RoHS=Yes, RoHS Compliant=Yes, Series=RC, Stock 1=90000, Supplier 1="Arrow Electronics", Supplier Part Number 1=RC0603FR-0724RL, Termination=SMD/SMT, Voltage Rating (DC)=50V
R3: library part RC0603FR-071K5L, "RES 1.5K OHM 1% 1/10W 0603", Case Code (Imperial)=0603, Case Code (Metric)=1608, Manufacturer 1=Yageo, Max Operating Temperature=155°C, Max Power Dissipation=100mW, Min Operating Temperature=-55°C, Package Quantity=1, Resistance Tolerance=1%, Resistor Type="Thick Film", Temperature Coefficient=100ppm/°C, Voltage Rating=50V, Case/Package=0603, Category="Chip SMD Resistors", ComponentLink1Description=https://datasheet.ciiva.com/46440/1868787-46440895.pdf?src-supplier=Element14, ComponentLink1URL=https://datasheet.ciiva.com/46440/1868787-46440895.pdf?src-supplier=Element14, ComponentLink2Description=https://datasheet.ciiva.com/2454/pyu-r-int-thick-7-2454514.pdf?src-supplier=Digi-Key, ComponentLink2URL=https://datasheet.ciiva.com/2454/pyu-r-int-thick-7-2454514.pdf?src-supplier=Digi-Key, ComponentLink3Description=https://datasheet.ciiva.com/2454/pyu-r-int-thick-7-2454515.pdf?src-supplier=Digi-Key, ComponentLink3URL=https://datasheet.ciiva.com/2454/pyu-r-int-thick-7-2454515.pdf?src-supplier=Digi-Key, ComponentLink4Description=https://datasheet.ciiva.com/2454/pyu-r-int-thick-7-2454513.pdf?src-supplier=Digi-Key, ComponentLink4URL=https://datasheet.ciiva.com/2454/pyu-r-int-thick-7-2454513.pdf?src-supplier=Digi-Key, Construction=Rectangular, Depth=0.8mm, Features="Moisture Resistant", Height=0.022inch, Lead Free="Lead Free", Length=0.063inch, Manufacturer Part Number 1=RC0603FR-071K5L, Military Standard=Not, Number of pins=2, Number of Terminations=2, Packaging="Tape and Reel", Power Rating=100mW, Pricing 1="5000=0,00350 (USD)", REACH SVHC="No SVHC", Resistance=1.5kR, RoHS=Yes, RoHS Compliant=Yes, Series=RC, Size Code=0603, Stock 1=15000, Supplier 1="Arrow Electronics", Supplier Part Number 1=RC0603FR-071K5L, Termination=SMD/SMT, Tolerance=1%, Voltage Rating (DC)=50V, Width=0.031inch
R4 R5 R6: library part RC0603FR-0710KL, "RES 10K OHM 1% 1/10W 0603", Case Code (Imperial)=0603, Case Code (Metric)=1608, Manufacturer 1=Yageo, Max Operating Temperature=155°C, Max Power Dissipation=100mW, Min Operating Temperature=-55°C, Resistance Tolerance=1%, Resistor Type="Thick Film", Temperature Coefficient=100ppm/°C, Voltage Rating=75V, Voltage Rating (DC)=50V, Case/Package=0603, Category="Chip SMD Resistors", ComponentLink1Description=https://datasheet.ciiva.com/7660/38590-7660789.pdf?src-supplier=Element14, ComponentLink1URL=https://datasheet.ciiva.com/7660/38590-7660789.pdf?src-supplier=Element14, ComponentLink2Description=https://datasheet.ciiva.com/7983/443971-7983596.pdf?src-supplier=Element14, ComponentLink2URL=https://datasheet.ciiva.com/7983/443971-7983596.pdf?src-supplier=Element14, ComponentLink3Description=https://datasheet.ciiva.com/22747/443971-22747519.pdf?src-supplier=Element14, ComponentLink3URL=https://datasheet.ciiva.com/22747/443971-22747519.pdf?src-supplier=Element14, ComponentLink4Description=https://datasheet.ciiva.com/46440/1868787-46440891.pdf?src-supplier=Element14, ComponentLink4URL=https://datasheet.ciiva.com/46440/1868787-46440891.pdf?src-supplier=Element14, ComponentLink5Description=https://datasheet.ciiva.com/7746/1738695-7746239.pdf?src-supplier=Element14, ComponentLink5URL=https://datasheet.ciiva.com/7746/1738695-7746239.pdf?src-supplier=Element14, Construction=Rectangular, Depth=0.8mm, Features="Moisture Resistant", Height=0.45mm, Lead Free="Lead Free", Lead Pitch=0.3mm, Length=1.6mm, Manufacturer Part Number 1=RC0603FR-0710KL, Military Standard=Not, Number of pins=2, Number of Terminations=2, Packaging="Tape and Reel", Power Rating=100mW, Pricing 1="5000=0,00240 (USD)", REACH SVHC=Unknown, Resistance=10kR, RoHS=Yes, RoHS Compliant=Yes, Series=RC, Size Code=0603, Stock 1=4950000, Supplier 1="Arrow Electronics", Supplier Part Number 1=RC0603FR-0710KL, Termination=SMD/SMT, Tolerance=1%, Weight=7.1E-05oz, Width=0.8mm
TP1 TP2 TP3 TP4 TP5: "STM TEST POINT"
U1: "TVS DIODE 5.25VWM 17VC SOT23-6", Breakdown Voltage=6V, Capacitance=3.5pF, Case/Package=SOT-23, Clamping Voltage=17V, Leakage Current=150nA, Manufacturer 1=STMicroelectronics, Max Operating Temperature=125°C, Min Operating Temperature=-40°C, Operating Supply Voltage=1.1V, Package Quantity=3000, Peak Pulse Current=5A, Power Line Protection=Yes, Reverse Standoff Voltage=5.25V, Supplier Part Number 1=497-5235-6-ND, Test Current=1mA, Working Voltage=5V, Category="TVS Diodes", Clamping Voltage-Max=17V, ComponentLink1Description=https://datasheet.ciiva.com/1268/1690354-1268384.pdf?src-supplier=Element14, ComponentLink1URL=https://datasheet.ciiva.com/1268/1690354-1268384.pdf?src-supplier=Element14, ComponentLink2Description=https://datasheet.ciiva.com/4508/cd00050750-113117-4508433.pdf?src-supplier=Mouser, ComponentLink2URL=https://datasheet.ciiva.com/4508/cd00050750-113117-4508433.pdf?src-supplier=Mouser, ComponentLink3Description=https://datasheet.ciiva.com/15143/getdatasheetpartid-148465-15143789.pdf?src-supplier=Verical, ComponentLink3URL=https://datasheet.ciiva.com/15143/getdatasheetpartid-148465-15143789.pdf?src-supplier=Verical, ComponentLink4Description=https://datasheet.ciiva.com/16200/cd00050750-16200026.pdf?src-supplier=Future+Electronics, ComponentLink4URL=https://datasheet.ciiva.com/16200/cd00050750-16200026.pdf?src-supplier=Future+Electronics, ComponentLink5Description=https://datasheet.ciiva.com/41444/001184109-da-01-en-ic-esd-protecti-usblc6-2sc6-sot-23-6-stm-41444156.pdf?src-supplier=Conrad, ComponentLink5URL=https://datasheet.ciiva.com/41444/001184109-da-01-en-ic-esd-protecti-usblc6-2sc6-sot-23-6-stm-41444156.pdf?src-supplier=Conrad, Contact Plating=Tin,Matte, Data Rate=480Mbps, Depth=1.75mm, Direction=Unidirectional,Bidirectional, Element Configuration=Dual, ESD Protection=Yes, Height=1.3mm, Lead Free="Lead Free", Length=3.05mm, Manufacturer Part Number 1=USBLC6-2SC6, Max Breakdown Voltage=6V, Max Reverse Leakage Current=150nA, Min Breakdown Voltage=6V, Mount="Surface Mount", Number of Bidirectional Channels=2, Number of Channels=2, Number of Elements=1, Number of pins=6, Packaging="Tape and Reel", Polarity=Unidirectional,Bidirectional, Pricing 1="1=0.63000, 10=0.54200, 100=0.40440, 500=0.31774, 1000=0.24553 (USD)", Radiation Hardening=No, REACH SVHC="No SVHC", Reverse Breakdown Voltage=6V, RoHS=Yes, RoHS Compliant=Yes, Series=USB, Supplier 1=Digi-Key, Termination=SMD/SMT, Width=1.75mm
U2: "TVS DIODE 5VWM 17.5VC SOT23-6", Manufacturer 1="Sangdest Microelectronics", Supplier Part Number 1=1655-1653-1-ND, Category="TVS Diodes", Manufacturer Part Number 1=SRV05-4ATR, Pricing 1="1=0,45000, 10=0,36700, 100=0,24990, 500=0,18744, 1000=0,14058 (USD)", RoHS=No, Stock 1=31500, Supplier 1=Digi-Key
U3: "IC MCU 32BIT 32KB FLASH 48LQFP", Case/Package=LQFP, Frequency=72MHz, Manufacturer 1=STMicroelectronics, Max Operating Temperature=85°C, Max Power Dissipation=363mW, Max Supply Voltage=3.6V, Min Operating Temperature=-40°C, Min Supply Voltage=2V, Package Quantity=1500, Supplier Part Number 1=57P1219, Address Bus Width=32b, Category=Microcontrollers, ComponentLink1Description=https://datasheet.ciiva.com/15122/getdatasheetpartid-69879-15122075.pdf?src-supplier=Verical, ComponentLink1URL=https://datasheet.ciiva.com/15122/getdatasheetpartid-69879-15122075.pdf?src-supplier=Verical, ComponentLink2Description=https://datasheet.ciiva.com/14100/pustm-arm-microcont-stm32f103-en-14100507.pdf?src-supplier=Distrelec, ComponentLink2URL=https://datasheet.ciiva.com/14100/pustm-arm-microcont-stm32f103-en-14100507.pdf?src-supplier=Distrelec, Core Architecture=ARM, Data Bus Width=32b, Height=1.4mm, Interface=I2C,SPI,USART, Lead Free="Lead Free", Length=7mm, Manufacturer Part Number 1=STM32F103C6T6A, Max Frequency=72MHz, Memory Size=32KB, Memory Type=FLASH, Number of ADC Channels=10, Number of I2C Channels=1, Number of I/Os=37, Number of pins=48, Number of Programmable I/O=37, Number of SPI Channels=1, Number of Timers/Counters=3, Oscillator Type=Internal, Packaging=Tray, Peripherals="POR,PWM,WDT,DMA,Temp Sensor,I2C", Pricing 1="1=6,56000, 10=5,90000, 1500=5,90000 (USD)", Radiation Hardening=No, RAM Size=10KB, REACH SVHC="No SVHC", RoHS=Yes, RoHS Compliant=Yes, Series=STM32F103C6, Supplier 1=Newark, Watchdog Timer=Yes, Weight=0.006409oz, Width=7mm
Y1: library part ATS080B-E, "CRYSTAL 8.0000MHZ 18PF TH", ESR (Equivalent Series Resistance)=60R, Frequency Stability=50ppm, Frequency Tolerance=30ppm, Load Capacitance=18pF, Manufacturer 1=CTS, Max Operating Temperature=85°C, Min Operating Temperature=-40°C, Package Quantity=100, Category=Crystals, ComponentLink1Description=https://datasheet.ciiva.com/859/008-0309-0-859649.pdf?src-supplier=Digi-Key, ComponentLink1URL=https://datasheet.ciiva.com/859/008-0309-0-859649.pdf?src-supplier=Digi-Key, ComponentLink2Description=https://datasheet.ciiva.com/3176/008-0309-0-3176342.pdf?src-supplier=Avnet, ComponentLink2URL=https://datasheet.ciiva.com/3176/008-0309-0-3176342.pdf?src-supplier=Avnet, ComponentLink3Description=https://datasheet.ciiva.com/4945/008-0309-0-32667-4945355.pdf?src-supplier=Mouser, ComponentLink3URL=https://datasheet.ciiva.com/4945/008-0309-0-32667-4945355.pdf?src-supplier=Mouser, Contact Plating=Copper,Tin,Silver, Frequency=8MHz, Height=0.145inch, Length=0.427inch, Manufacturer Part Number 1=ATS080B-E, Mount="Through Hole", Number of pins=2, Packaging=Bulk, Pricing 1="1000=0.18120, 1200=0.17880, 2200=0.17040, 5000=0.13800, 10000=0.12150, 50000=0.10956, 100000=0.10707 (USD)", RoHS=Yes, RoHS Compliant=Yes, Series=ATS, Stock 1=4510, Supplier 1=Avnet, Supplier Part Number 1=ATS080B-E, Termination=Radial, Tolerance=30ppm, Width=0.177inch

## Nets (pads, with @x,y where several pads share a name; then routed paths per layer and width w, separated by ;. In a path a pad name is that pad's centre, name@x,y a point inside that pad or via, vN(x,y) a via of type N, cw(c..) or ccw(c..) an arc to the next point about the centre after c; other vN are vias at no path point)
3V3: C3.1 C4.2 C6.2 C7.1 C8.1 C9.1 C10.1 D1.2 DA1.5 R3.1 R4.1 TP1.1 U2.5 U3.1 U3.9 U3.24 U3.36 U3.48 | length 7.9
  Bottom Layer w0.2: U2.5 2.77,0.03 3.1,-0.3 3.1,-2.8 5.35,-5.05 TP1.1
5V: C1.2 C2.1 D1.1 DA1.1 DA1.3 U1.5
D_N: R1.2 U1.3
D_P: R2.2 R3.2 U1.1
GND: C1.1 C2.2 C3.2 C4.1 C5.2 C6.1 C7.2 C8.2 C9.2 C10.2 C11.2 C12.2 DA1.2 R5.1 R6.1 TP3.1 U1.2 U2.2 U3.8 U3.20 U3.23 U3.35 U3.47 | length 2.1
  Bottom Layer w0.2: U2.2 TP3.1
LED_DIM: U3.29
MCU_INT: U3.45
MCU_SCL: U3.42
MCU_SDA: U3.43
MCU_USB_D_N: R1.1 U3.32
MCU_USB_D_P: R2.1 U3.33
NetC11_1: C11.1 U3.5 Y1.2
NetC12_1: C12.1 U3.6 Y1.1
NetR5_2: R5.2 U3.44
NetR6_2: R6.2 U3.2
NRST: C5.1 R4.2 TP5.1 U2.6 U3.7 | length 7.1
  Bottom Layer w0.2: U2.6 1.85,1.95 3.741,3.841 5.741,3.841 6.2,4.3 TP5.1
SWCLK: TP2.1 U2.3 U3.37 | length 3.2
  Bottom Layer w0.2: U2.3 5.488,-0.92 6.2,-1.632 TP2.1
SWDIO: TP4.1 U2.1 U3.34 | length 3.2
  Bottom Layer w0.2: U2.1 5.48,0.98 6.2,1.7 TP4.1
TOF_EN: U3.46
USB_N: U1.4
USB_P: U1.6
pads on no net: DA1.4 U2.4 U3.3 U3.4 U3.10 U3.11 U3.12 U3.13 U3.14 U3.15 U3.16 U3.17 U3.18 U3.19 U3.21 U3.22 U3.25 U3.26 U3.27 U3.28 U3.30 U3.31 U3.38 U3.39 U3.40 U3.41

## Silkscreen, mask and mechanical layers (free items; w line width, h text height)
Board Outline:
  lines w0.05: -7.4,-18.5 7.4,-18.5 7.4,18.5 0,18.5 -7.4,18.5 -7.4,-18.5